# EAGLE board Propulsion Shield (EAGLE 8.3.2)
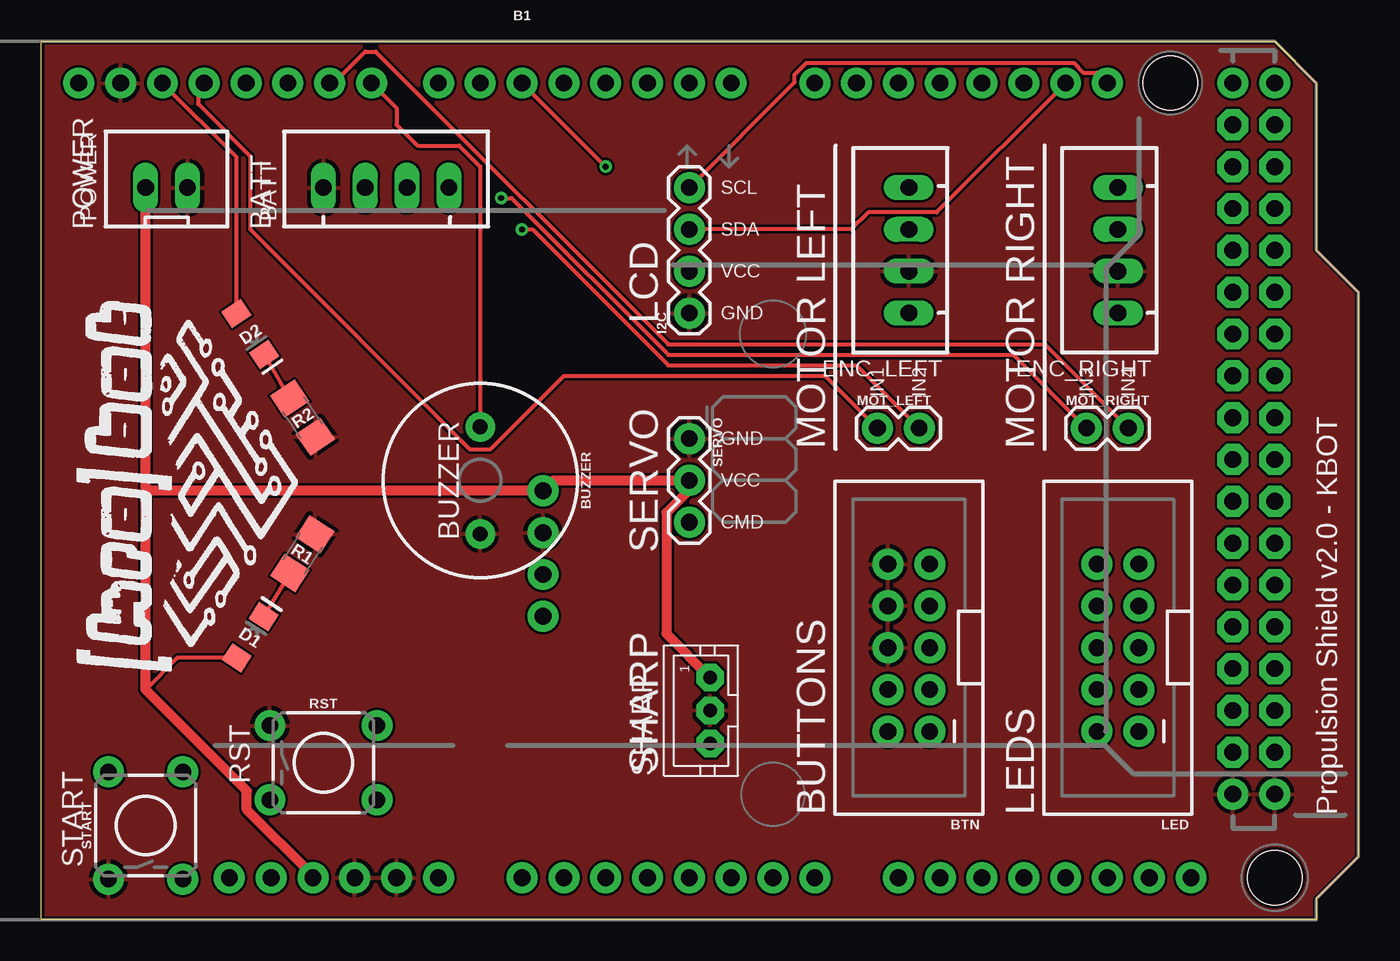
[diagram p0: board, top side]
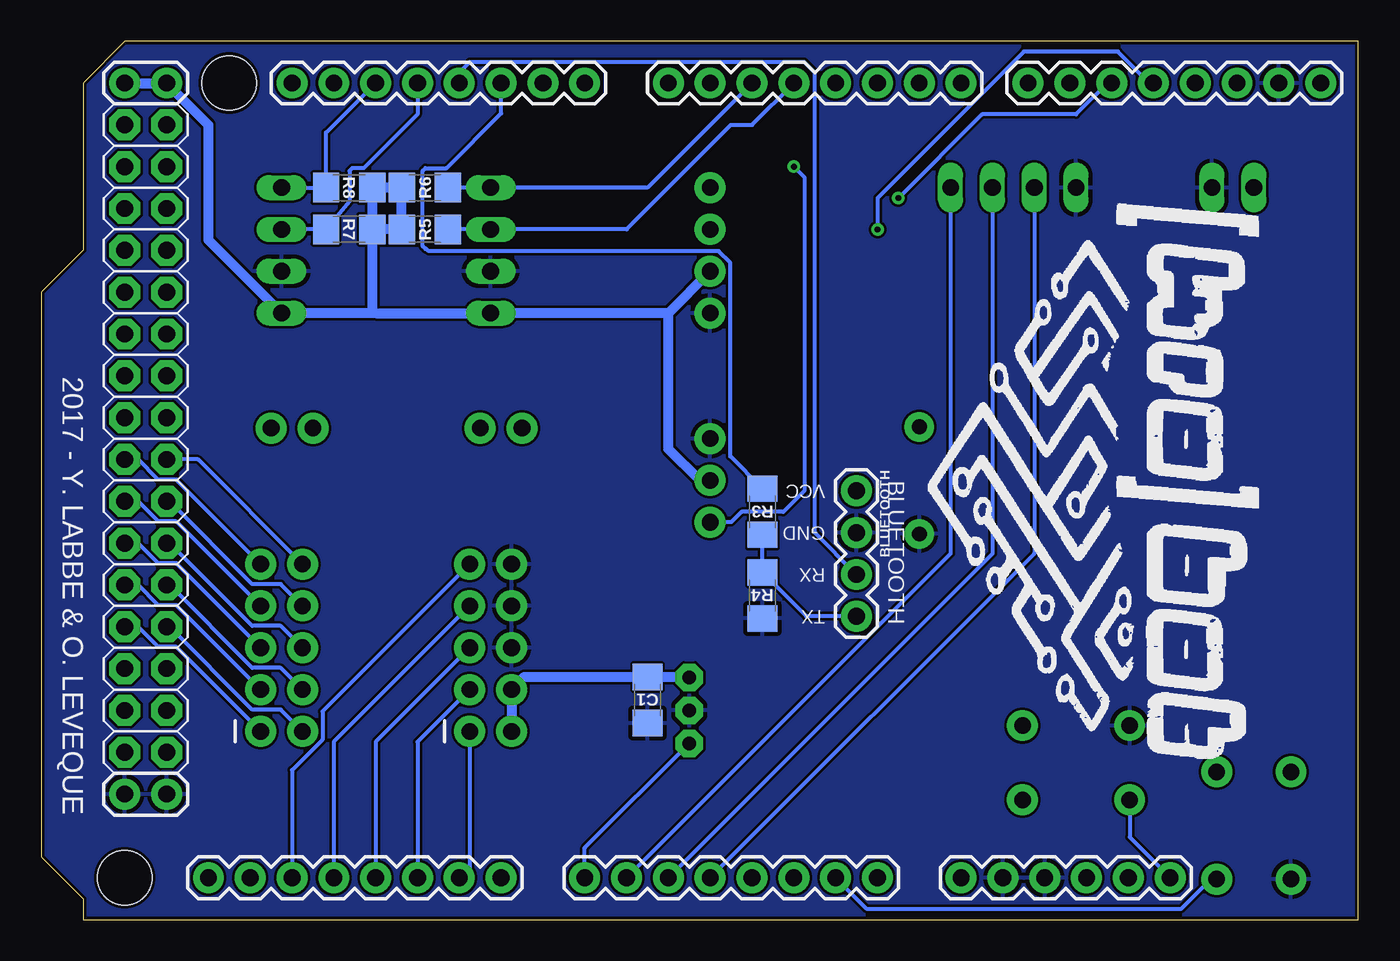
[diagram p1: board, bottom side, seen from below]

Size 80.01 x 53.34 mm. Coordinates in mm from the lower left corner, seen from the top.
Outline: 74.93,53.34 77.47,50.8 77.47,40.64 80.01,38.1 80.01,3.81 77.47,1.27 77.47,0 0,0 0,53.34 74.93,53.34
Copper layers (1*16): Top 0.035mm / dielectric 1.5mm / Bottom 0.035mm
Design rules "default *": minimum track width 6mil, minimum drill 12mil, track to track 6mil, track to pad 6mil, pad to pad 6mil, via to via 6mil, smd to smd 6mil, copper to edge 8mil, drill to drill 6mil, minimum pad ring 10mil, minimum via ring 8mil, stop-mask expansion 4mil, vias tented up to drill 0mil, thermal gap 10mil
Holes 3.3 mm at 68.58,50.8 74.93,2.54

## Footprints (pad centres in the part's own frame; a part is rotated, then mirrored left to right if it is on the bottom)
ARDUINO_MEGA = drill 1.016 pad 1.88: 0 13.97,24.13; 1 11.43,24.13; 2 8.89,24.13; 3 6.35,24.13; 3.3V -13.97,-24.13; 4 3.81,24.13; 5 1.27,24.13; 5V@0 -11.43,-24.13; 5V@1 44.45,24.13; 5V@2 46.99,24.13; 6 -1.27,24.13; 7 -3.81,24.13; 8 -7.874,24.13; 9 -10.414,24.13; 10 -12.954,24.13; 11 -15.494,24.13; 12 -18.034,24.13; 13 -20.574,24.13; 14 19.05,24.13; 15 21.59,24.13; 16 24.13,24.13; 17 26.67,24.13; 18 29.21,24.13; 19 31.75,24.13; 20 34.29,24.13; 21 36.83,24.13; A0 1.27,-24.13; A1 3.81,-24.13; A2 6.35,-24.13; A3 8.89,-24.13; A4 11.43,-24.13; A5 13.97,-24.13; A6 16.51,-24.13; A7 19.05,-24.13; A8 24.13,-24.13; A9 26.67,-24.13; A10 29.21,-24.13; A11 31.75,-24.13; A12 34.29,-24.13; A13 36.83,-24.13; A14 39.37,-24.13; A15 41.91,-24.13; AREF -25.654,24.13; GND@0 -8.89,-24.13; GND@1 -6.35,-24.13; GND@2 44.45,-19.05; GND@3 46.99,-19.05; GND@4 -23.114,24.13; RESET -16.51,-24.13; VIN -3.81,-24.13 | drill 1.016 pad 1.88 octagon: 22 44.45,21.59; 23 46.99,21.59; 24 44.45,19.05; 25 46.99,19.05; 26 44.45,16.51; 27 46.99,16.51; 28 44.45,13.97; 29 46.99,13.97; 30 44.45,11.43; 31 46.99,11.43; 32 44.45,8.89; 33 46.99,8.89; 34 44.45,6.35; 35 46.99,6.35; 36 44.45,3.81; 37 46.99,3.81; 38 44.45,1.27; 39 46.99,1.27; 40 44.45,-1.27; 41 46.99,-1.27; 42 44.45,-3.81; 43 46.99,-3.81; 44 44.45,-6.35; 45 46.99,-6.35; 46 44.45,-8.89; 47 46.99,-8.89; 48 44.45,-11.43; 49 46.99,-11.43; 50 44.45,-13.97; 51 46.99,-13.97; 52 44.45,-16.51; 53 46.99,-16.51
JST-XH-04-PACKAGE-LONG-PAD = drill 1.016 long: 1 0,0; 2 2.54,0; 3 5.08,0; 4 7.62,0
1X04 = drill 1.016 pad 1.88: 1 0,0; 2 2.54,0; 3 5.08,0; 4 7.62,0
2X5-SHROUDED = drill 1.016 pad 1.88: 1 -1.27,5.08; 2 1.27,5.08; 3 -1.27,2.54; 4 1.27,2.54; 5 -1.27,0; 6 1.27,0; 7 -1.27,-2.54; 8 1.27,-2.54; 9 -1.27,-5.08; 10 1.27,-5.08
BUZZER-12MM = drill 0.9 pad 1.778: + 3.25,0; - -3.25,0
1206 = smd 1.6 x 1.8: 1 -1.4,0; 2 1.4,0
LED-1206 = smd 1.2 x 1.4: A -1.5,0; C 1.5,0
1X02 = drill 1.016 pad 1.88: 1 0,0; 2 2.54,0
JST-XH-02-PACKAGE-LONG-PAD = drill 1.016 long: 1 0,0; 2 2.54,0
TACTILE_SWITCH_PTH_6.0MM = drill 1.016 pad 1.88: 1 -3.251,2.261; 2 3.251,2.261; 3 -3.251,-2.261; 4 3.251,-2.261
1X03 = drill 1.016 pad 1.88: 1 0,0; 2 2.54,0; 3 5.08,0
JST-PH3 = drill 0.813 pad 1.676 octagon: 1 2,0; 2 0,0; 3 -2,0

## Placement (x,y rotation side)
B1  ARDUINO_MEGA_R3FULL  [ARDUINO_MEGA]  27.94,26.67 0 top
BATT  JST-XH-04-PIN-LONG-PAD  [JST-XH-04-PACKAGE-LONG-PAD]  17.14,44.45 0 top
BLUETOOTH  [1X04]  30.48,26.04 270 bottom
BTN  [2X5-SHROUDED]  52.7,16.51 180 top
BUZZER  BUZZER-PTH  [BUZZER-12MM]  26.67,26.67 270 top
C1  10uF  [1206]  43.18,13.34 270 bottom
D1  RED  [LED-1206]  12.7,17.14 57 top
D2  BLUE  [LED-1206]  12.7,35.56 304 top
ENC_LEFT  JST-XH-04-PIN-LONG-PAD  [JST-XH-04-PACKAGE-LONG-PAD]  52.7,36.83 90 top
ENC_RIGHT  JST-XH-04-PIN-LONG-PAD  [JST-XH-04-PACKAGE-LONG-PAD]  65.41,36.83 90 top
I2C  [1X04]  39.37,36.83 90 top
LED  [2X5-SHROUDED]  65.41,16.51 180 top
MOT_LEFT  [1X02]  50.8,29.84 0 top
MOT_RIGHT  [1X02]  63.5,29.84 0 top
POWER  JST-XH-02-PIN-LONG-PAD  [JST-XH-02-PACKAGE-LONG-PAD]  6.35,44.45 0 top
R1  470  [1206]  15.88,22.23 57 top
R2  470  [1206]  15.88,30.48 304 top
R3  1k  [1206]  36.2,24.77 90 bottom
R4  2k  [1206]  36.2,19.68 90 bottom
R5  1k  [1206]  56.7,41.91 180 bottom
R6  1k  [1206]  56.7,44.45 180 bottom
R7  1k  [1206]  61.3,41.91 0 bottom
R8  1k  [1206]  61.3,44.45 0 bottom
RST  MOMENTARY-SWITCH-SPST-PTH-6.0MM  [TACTILE_SWITCH_PTH_6.0MM]  17.14,9.53 0 top
SERVO  [1X03]  39.37,29.21 270 top
SHARP  [JST-PH3]  40.64,12.7 90 top
START  MOMENTARY-SWITCH-SPST-PTH-6.0MM  [TACTILE_SWITCH_PTH_6.0MM]  6.35,5.71 90 top
U$1  [LOGO_22MM]  8.26,26.67 90 top
U$2  [LOGO_33MM]  15.24,26.04 270 bottom

## Library data of the parts
B1 SHARP U$1 U$2 = KROBOT
BATT ENC_LEFT ENC_RIGHT POWER = MrRobotics-Connectors
BLUETOOTH I2C = SparkFun-Connectors; PROD_ID: CONN-09696
BTN LED = SparkFun-Connectors; PROD_ID: CONN-08671; SF_ID: PRT-08506
BUZZER = SparkFun-Electromechanical; PROD_ID: COMP-08253; SF_SKU: COM-07950
C1 = SparkFun-Capacitors; PROD_ID: CAP-10057
D1 = SparkFun-LED; PROD_ID: DIO-09912
D2 = SparkFun-LED; PROD_ID: DIO-09911
MOT_LEFT MOT_RIGHT SERVO = SparkFun-Connectors
R1-R8 = SparkFun-Resistors
RST START = SparkFun-Switches; PROD_ID: SWCH-08441; SF_SKU: COM-00097

## Nets
5V: B1.5V@0 B1.5V@1 B1.5V@2 BLUETOOTH.1 BTN.2 BTN.4 C1.1 D1.A ENC_LEFT.1 ENC_RIGHT.1 I2C.2 POWER.1 R5.2 R6.2 R7.2 R8.2 SERVO.2 SHARP.1
BT_RX: B1.17 BLUETOOTH.3
BT_TX: B1.16 R3.2
BTN_CENTER: B1.A11 BTN.5
BTN_DOWN: B1.A10 BTN.3
BTN_LEFT: B1.A12 BTN.7
BTN_RIGHT: B1.A13 BTN.9
BTN_UP: B1.A9 BTN.1
BUZZER: B1.8 BUZZER.-
ENC1_A: B1.3 ENC_LEFT.3 R5.1
ENC1_B: B1.2 ENC_LEFT.4 R6.1
ENC2_A: B1.18 ENC_RIGHT.3 R7.1
ENC2_B: B1.19 ENC_RIGHT.4 R8.1
GND: B1.GND@0 B1.GND@1 B1.GND@2 B1.GND@3 B1.GND@4 BATT.1 BLUETOOTH.2 BTN.6 BTN.8 BTN.10 BUZZER.+ C1.2 ENC_LEFT.2 ENC_RIGHT.2 I2C.1 POWER.2 R1.2 R2.2 R4.1 RST.1 SERVO.1 SHARP.2 START.1
I2C_SCL: B1.21 I2C.4
I2C_SDA: B1.20 I2C.3
MOT1_1: B1.12 MOT_LEFT.1
MOT1_2: B1.11 MOT_LEFT.2
MOT2_1: B1.10 MOT_RIGHT.1
MOT2_2: B1.9 MOT_RIGHT.2
N$1: B1.RESET RST.3
N$2: D1.C R1.1
N$3: B1.13 D2.A
N$4: D2.C R2.1
N$5: BLUETOOTH.4 R3.1 R4.2
N$6: B1.A1 START.3
S1: B1.A4 BATT.2
S2: B1.A5 BATT.3
S3: B1.A6 BATT.4
SERVO: B1.5 SERVO.3
SHARP: B1.A7 SHARP.3
UI_LED0: B1.47 LED.1
UI_LED1: B1.45 LED.3
UI_LED2: B1.43 LED.5
UI_LED3: B1.41 LED.7
UI_LED4: B1.39 LED.9
UI_LED5: B1.38 LED.10
UI_LED6: B1.40 LED.8
UI_LED7: B1.42 LED.6
UI_LED8: B1.44 LED.4
UI_LED9: B1.46 LED.2

## Tracks (layer width: path | path; a pad name or v marks a point on that pad's centre or on a via)
5V
  Top 0.254: D1.A 8.27,15.89 6.35,13.97
  Top 0.61: B1.5V@0 16.51,2.67 12.5,6.69 12.5,7.82 6.35,13.97 6.35,26.04 | 6.35,26.04 BLUETOOTH.1 31.11,26.67 SERVO.2 39.37,26.11 37.97,24.71 37.97,17.37 SHARP.1 | 6.35,26.04 POWER.1
  Bottom 0.61: R7.2 R8.2 R6.2 R5.2 R7.2 | BTN.2 BTN.4 50.67,14.73 C1.1 40.67,14.73 SHARP.1 | B1.5V@2 B1.5V@1 69.85,48.26 69.85,41.27 ENC_RIGHT.1 59.69,36.83 | 59.69,36.83 ENC_LEFT.1 41.91,36.83 | 41.91,36.83 I2C.2 | SERVO.2 40.01,26.67 41.91,28.57 41.91,36.83 | R7.2 59.9,37.04 59.69,36.83
BT_RX
  Bottom 0.254: BLUETOOTH.3 33.02,23.5 33.02,51.44 33.66,52.07 53.98,52.07 54.61,51.44 B1.17
BT_TX
  Bottom 0.254: R3.2 38.15,28.12 38.15,39.88 38.87,40.59 56.46,40.59 56.61,40.73 56.67,40.73 56.83,40.89 56.83,45.47 56.67,45.63 55.4,45.63 52.07,48.95 B1.16
BTN_CENTER
  Bottom 0.254: BTN.5 59.69,10.79 B1.A11
BTN_DOWN
  Bottom 0.254: BTN.3 57.15,10.79 B1.A10
BTN_LEFT
  Bottom 0.254: BTN.7 62.23,10.79 B1.A12
BTN_RIGHT
  Bottom 0.254: BTN.9 62.92,12.65 62.92,10.93 64.77,9.07 B1.A13
BTN_UP
  Bottom 0.254: BTN.1 53.98,3.17 B1.A9
BUZZER
  Top 0.254: B1.8 21.59,49.28 21.59,48.26 22.86,46.99 25.4,46.99 26.67,45.72 BUZZER.-
ENC1_A
  Bottom 0.254: B1.3 36.83,48.26 38.1,48.26 44.45,41.91 ENC_LEFT.3 R5.1
ENC1_B
  Bottom 0.254: B1.2 43.18,44.45 ENC_LEFT.4 R6.1
ENC2_A
  Bottom 0.254: B1.18 57.15,48.9 60.42,45.63 61.11,45.63 61.27,45.47 61.27,43.63 R7.1 ENC_RIGHT.3
ENC2_B
  Bottom 0.254: ENC_RIGHT.4 R8.1 62.7,47.79 B1.19
GND
  pour Top: 0,53.34 74.93,53.34 77.47,50.8 77.47,40.64 80.01,38.1 80.01,3.81 77.47,1.27 77.47,0 0,0
  pour Bottom: 0,53.34 74.93,53.34 77.47,50.8 77.47,40.64 80.01,38.1 80.01,3.81 77.47,1.27 77.47,0 0,0
  pour Bottom: 0,53.34 0,0 80.64,0 80.64,53.34
  pour Top: 0,53.34 0,0 80.64,0 80.64,53.34
I2C_SCL
  Top 0.254: I2C.4 45.77,50.85 45.77,51.3 46.48,52.02 62.73,52.02 63.32,51.44 64.14,51.44 B1.21
I2C_SDA
  Top 0.254: I2C.3 49.2,41.91 50.24,42.95 54.38,42.95 B1.20
MOT1_1
  Top 0.254: MOT_LEFT.1 47.62,33.02 31.75,33.02 27.3,28.57 26.04,28.57 12.7,41.91 12.7,46.35 9.53,49.53 9.53,50.8 B1.12
MOT1_2  (via drill 0.35)
  Top 0.254: MOT_LEFT.2 49.53,33.66 38.1,33.66 29.84,41.91 v29.21,41.91
  Bottom 0.254: v29.21,41.91 29.21,43.81 20.32,52.7 14.61,52.7 12.7,50.8 B1.11
MOT2_1  (via drill 0.35)
  Top 0.254: MOT_RIGHT.1 59.05,34.29 38.1,34.29 28.57,43.81 v27.94,43.81
  Bottom 0.254: v27.94,43.81 22.86,48.9 17.14,48.9 15.24,50.8 B1.10
MOT2_2
  Top 0.254: MOT_RIGHT.2 60.96,34.92 38.1,34.92 20.32,52.7 19.68,52.7 17.78,50.8 B1.9
N$1
  Bottom 0.254: RST.3 13.89,5 B1.RESET
N$2
  Top 0.254: R1.1 D1.C
N$3
  Top 0.254: D2.A 11.86,46.3 B1.13
N$4
  Top 0.254: R2.1 D2.C
N$5
  Bottom 0.254: BLUETOOTH.4 33.52,18.41 R4.2 R3.1
N$6
  Bottom 0.254: START.3 8.97,2.46 10.79,0.64 29.84,0.64 B1.A1
S1
  Bottom 0.254: BATT.2 19.68,22.23 B1.A4
S2
  Bottom 0.254: BATT.3 22.23,22.23 B1.A5
S3
  Bottom 0.254: BATT.4 24.77,22.23 B1.A6
SERVO  (via drill 0.35)
  Top 0.254: B1.5 v34.29,45.72
  Bottom 0.254: SERVO.3 38.1,24.13 37.47,24.77 34.92,24.77 33.66,26.04 33.66,45.09 v34.29,45.72
SHARP
  Bottom 0.254: B1.A7 46.99,4.35 SHARP.3
UI_LED0
  Bottom 0.254: LED.1 71.81,16.56 72.89,16.56 74.11,17.78 B1.47
UI_LED1
  Bottom 0.254: LED.3 71.81,19.1 72.89,19.1 74.11,20.32 B1.45
UI_LED2
  Bottom 0.254: LED.5 71.81,21.64 72.89,21.64 74.11,22.86 B1.43
UI_LED3
  Bottom 0.254: LED.7 71.81,24.18 72.89,24.18 74.11,25.4 B1.41
UI_LED4
  Bottom 0.254: LED.9 71.81,26.72 72.89,26.72 74.11,27.94 B1.39
UI_LED5
  Bottom 0.254: LED.10 70.48,27.94 B1.38
UI_LED6
  Bottom 0.254: LED.8 65.46,20.37 67.18,20.37 72.21,25.4 B1.40
UI_LED7
  Bottom 0.254: LED.6 65.46,17.83 67.18,17.83 72.21,22.86 B1.42
UI_LED8
  Bottom 0.254: LED.4 65.46,15.29 67.18,15.29 72.21,20.32 B1.44
UI_LED9
  Bottom 0.254: LED.2 65.46,12.75 67.18,12.75 72.21,17.78 B1.46

## Text on the board
tPlace: SCL | POWER | BATT | SDA | VCC | GND | LCD | IN1 | IN2 | IN3 | IN4 | GND | MOTOR LEFT | MOTOR RIGHT | BUZZER | SERVO | VCC | CMD | SHARP | RST | BUTTONS | LEDS | Propulsion Shield v2.0 - KBOT | START
bPlace: BLUETOOTH | VCC | GND | RX | TX | 2017 - Y. LABBE & O. LEVEQUE